# Altium PCB CHILD_BOARD_revA.PcbDoc (part 2 of 3)
Units mil, origin at the board's own origin, x right, y up, seen from the top; angles counter-clockwise.
Board outline 6000 x 4000 mil, 2 copper layers (Top Layer, Bottom Layer); 312 components, 224 nets, 1180 pads, 0 vias.
Unrouted connection lines stored in the file: 721.
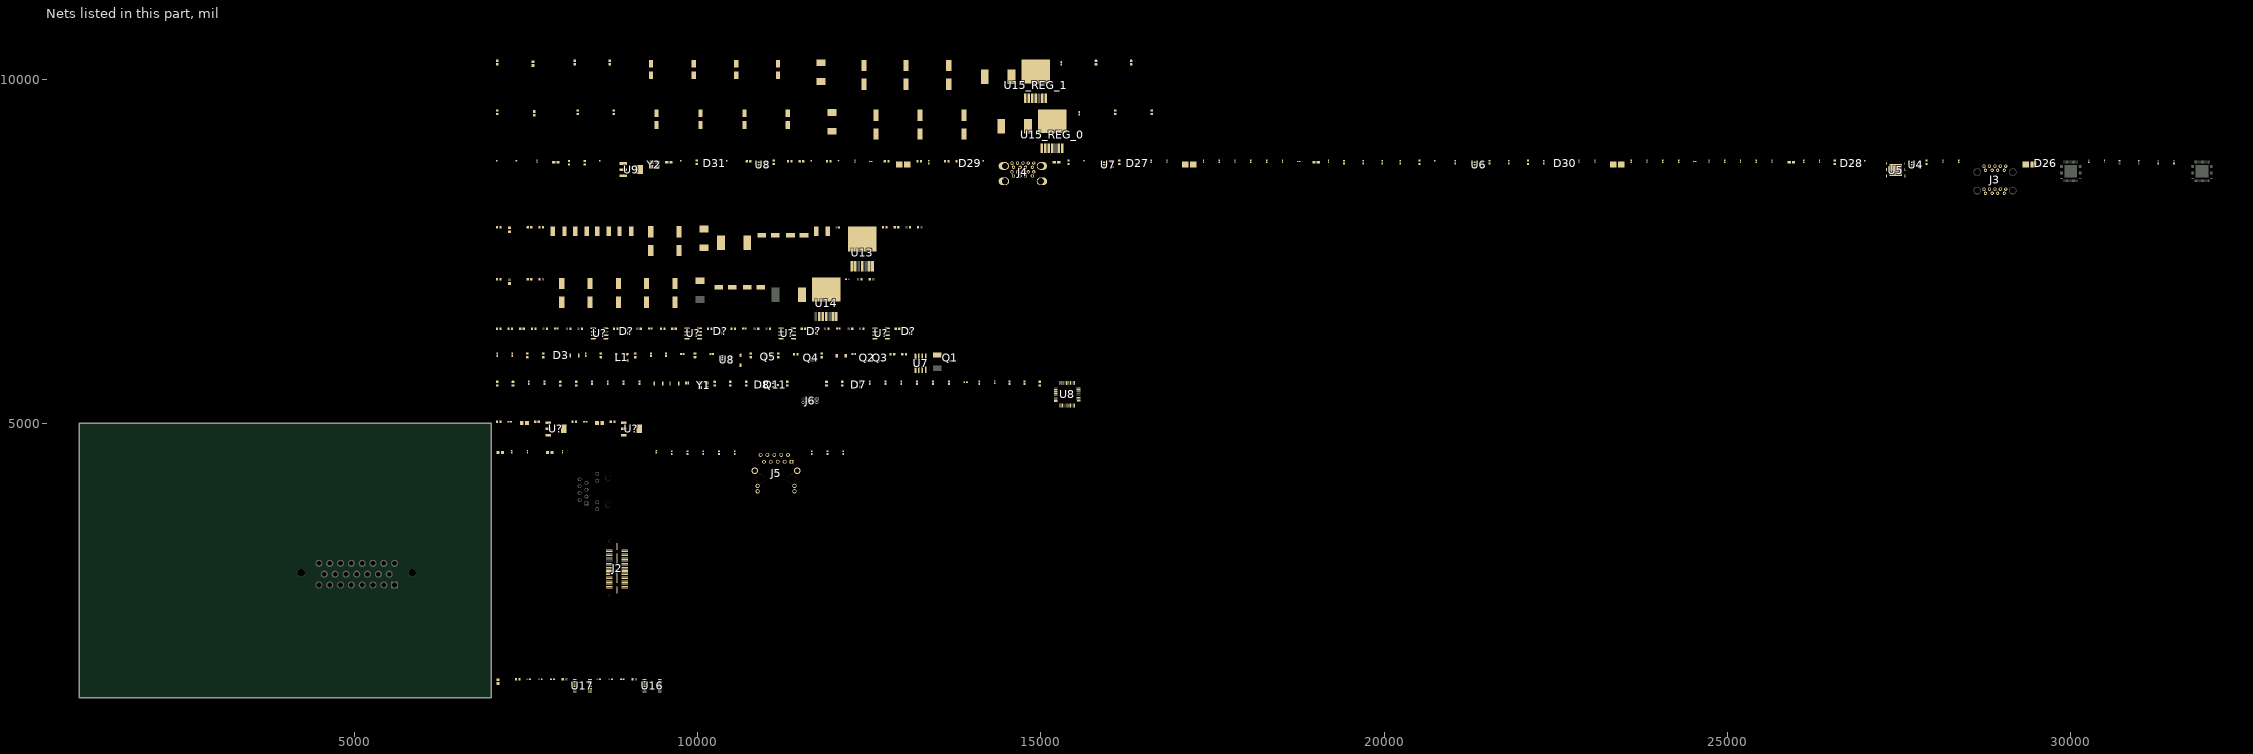
[diagram p2: the nets of this part, all layers, seen from the top]

## Footprints (in the part's own frame and the unit in brackets; to place one, negate y for a bottom-side part, rotate by r counter-clockwise, add the part's x,y. Pads: shape width x height; smd on the part's side, far side on the other; paste and mask are expansions set on the pad) (continued)
TCAN1146DYYRQ1-Footprint-1 [mil]
  rect 38.5x12 smd paste+0 mask+0: 1(-60.75,59.07) 2(-60.75,39.38) 3(-60.75,19.69) 4(-60.75,0) 5(-60.75,-19.69) 6(-60.75,-39.38) 7(-60.75,-59.07) 8(60.75,-59.07) 9(60.75,-39.38) 10(60.75,-19.69) 11(60.75,0) 12(60.75,19.69) 13(60.75,39.38) 14(60.75,59.07)
  silkscreen extent -46,-90 100,90, body extent -66,-84 66,84, height 43
TSQFP50P900X900X160-48N [mm] "TSQFP, 48-Leads, Body 7.00x7.00mm, Pitch 0.50mm, IPC Medium Density"
  oval 1.45x0.3 smd: 1(-4.225,2.75) 2(-4.225,2.25) 3(-4.225,1.75) 4(-4.225,1.25) 5(-4.225,0.75) 6(-4.225,0.25) 7(-4.225,-0.25) 8(-4.225,-0.75) 9(-4.225,-1.25) 10(-4.225,-1.75) 11(-4.225,-2.25) 12(-4.225,-2.75) 25(4.225,-2.75) 26(4.225,-2.25) 27(4.225,-1.75) 28(4.225,-1.25) 29(4.225,-0.75) 30(4.225,-0.25) 31(4.225,0.25) 32(4.225,0.75) 33(4.225,1.25) 34(4.225,1.75) 35(4.225,2.25) 36(4.225,2.75)
  oval 0.3x1.45 smd: 13(-2.75,-4.225) 14(-2.25,-4.225) 15(-1.75,-4.225) 16(-1.25,-4.225) 17(-0.75,-4.225) 18(-0.25,-4.225) 19(0.25,-4.225) 20(0.75,-4.225) 21(1.25,-4.225) 22(1.75,-4.225) 23(2.25,-4.225) 24(2.75,-4.225) 37(2.75,4.225) 38(2.25,4.225) 39(1.75,4.225) 40(1.25,4.225) 41(0.75,4.225) 42(0.25,4.225) 43(-0.25,4.225) 44(-0.75,4.225) 45(-1.25,4.225) 46(-1.75,4.225) 47(-2.25,4.225) 48(-2.75,4.225)
  silkscreen extent -4.35,-3.1 3.1,3.57, body extent -3.5,-3.5 3.5,3.5, height 1.6
WE-PD-L [mm] "SMD Inductor, 2-Leads, Body 12.0 x 12.0 mm"
  rect 2.9x5.4 smd: 1(-4.95,0) 2(4.95,0)
  silkscreen extent -6.25,-6.25 6.25,6.25, body extent -6,-6 6,6, height 5.98
WL-SBCD_0606 [mm] "SMT Bi-color Chip LED Diffuesed, body 1.5x1.6mm"
  rect 0.5x0.8 smd: 1(-0.45,0.8) 2(-0.45,-0.8) 3(0.45,-0.8) 4(0.45,0.8)
  silkscreen extent -0.07,1.48 0.08,1.62, body extent -0.75,-0.8 0.75,0.8, height 0.55

## Part data
C8 C9 C10 C11 C12 C13 C14 C17 C18 C19 C20 C21 C22 C23 C24 C25 C26 C27 C33 C34 C35 C36 C39 C40 C? C? C? C? C? C? C? C? C? C? C? C? C? C? C?_REG_0 C?_REG_1: library part CMP-001-00058-1, "LARGE PADS, 0402 CAP, CHANGE COMMENT TO MATCH REAL P/N", Capacitor Type=Ceramic, Case/Package=0402, Max Operating Temperature=85°C, Min Operating Temperature=-55°C, Mounting Technology="Surface Mount", Pins=2, RoHS Compliant=Yes
C55 C61 C77 C89: library part CMP-1664-00002-2, "Tantalum Capacitor, 330 uF, +/- 20%, 2.5 V, -55 to 105 degC, 2-Pin Molded, RoHS, Tape and Reel", Capacitance="330 uF", Case/Package=1411, Max Operating Temperature="105 degC", Min Operating Temperature="-55 degC", Package Quantity=2000, ComponentLink1Description="Manufacturer URL", ComponentLink1URL=http://www.kemet.com/, ComponentLink2Description=Datasheet, ComponentLink2URL=http://capacitoredge.kemet.com/capedge2/DataSheet?pn=T520B337M2R5ATE045, DatasheetVersion=07/2016, Height="2.1 mm", Length="3.5 mm", Mount="Surface Mount", Mounting Technology="Surface Mount", PackageDescription="2-Pin Surface Mount Device, Body 3.5 x 2.8 mm", Packaging="Tape and Reel", PartNumber=T520B337M2R5ATE045, Radiation Hardening=No, RoHSCompliant=True, Width="2.8 mm"
C56 C57 C59 C60 C62 C63 C64 C65 C66 C67 C68 C69 C70 C71 C72 C73 C74 C75 C78 C79 C80 C81 C82 C83 C84 C85 C86 C87 C90 C91 C96 C97 C98 C99 C100: library part CMP-2000-05393-2, "Multilayer Ceramic Capacitors 100nF ±10% 50V X7R SMD 0402", Capacitance=100nF, Case Code (Imperial)=0402, Case Code (Metric)=1005, Dielectric=X7R, Dielectric Material=Ceramic, Max Operating Temperature=125°C, Min Operating Temperature=-55°C, Package Quantity=1, Tolerance=10%, Voltage=50V, Case/Package=0402, Construction=Flat, Depth=0.5mm, Height=0.5mm, Lead Free="Lead Free", Length=1mm, Mount="Surface Mount", Packaging="Tape and Reel", Radiation Hardening=No, REACH SVHC="No SVHC", Resistor Type=Ceramic, RoHS Compliant=Yes, Series=C, Termination=SMD/SMT, Thickness=0.022inch, Voltage Rating=50V, Voltage Rating (DC)=50V, Weight=2.3E-05oz, Width=0.02inch
C58 C76 C88 C94 C95: library part CMP-2006-02792-2, "Chip Multilayer Ceramic Capacitors for General Purpose, 0603, 10uF, X5R, 15%, 20%, 6.3V", Capacitance=10uF, Case Code (Imperial)=0603, Case Code (Metric)=1608, Dielectric=X5R, Max Operating Temperature=85°C, Min Operating Temperature=-55°C, Package Quantity=4000, Tolerance=20%, Voltage=6.3V, Case/Package=0603, Depth=0.8mm, Height=0.8mm, Lead Free="Lead Free", Length=1.6mm, Material=Ceramic, Mount="Surface Mount", Packaging="Tape and Reel", Radiation Hardening=No, REACH SVHC="No SVHC", Termination=SMD/SMT, Thickness=0.035inch, Voltage Rating=6.3V, Voltage Rating (DC)=6.3V, Width=0.031inch
C92 C93: library part CMP-1035-00914-3, "CAP CER 30PF 50V 5% NP0 0603", Capacitance="30 pF", Manufacturer=KEMET, Package=C0603C-CF, Temperature="-55°C to +125°C", Temperature Characteristic=C0G, Temperature Coefficient=30ppm/°C, Temperature Range High=+125°C, Temperature Range Low=-55°C, Tolerance=0.05, Voltage Rating="50 V", Automotive=Yes, Automotive Grade="Grade 1", Category=Cap, ComponentLink2Description=Datasheet, ComponentLink2URL=https://api.kemet.com/component-edge/download/datasheet/C0603C100J5GACAUTO.pdf, Device Class L1="Passive Components", Device Class L2=Capacitors, Device Class L3="Ceramic Capacitors", Digikey Description="CAP CER 30PF 50V 5% NP0 0603", Height=0.87mm, Lead Free=Yes, Manufacturer Part Number=C0603C300J5GACTU, Material=Ceramic, Mouser Description="Multilayer Ceramic Capacitors MLCC - SMD/SMT 50volts 30pF C0G 5%", Octopart=https://octopart.com/c0603c300j5gactu-kemet-199455, RoHS=TRUE
C141 C142 C148 C149: library part CMP-05428-001211-1, "Conductive Polymer Hybrid Aluminum Electrolytic Capacitors 68uF ±20% 35V RADIAL SMT 6.3x7.7mm", Capacitance=68uF, Case/Package=Radial, ESR (Equivalent Series Resistance)=35mR, Leakage Current=23.8uA, Max Operating Temperature=105°C, Min Operating Temperature=-55°C, Package Quantity=900, Ratings=AEC-Q200, Ripple Current=2A, Tolerance=20%, Voltage=35V, Construction=Cylindrical, Diameter=6.3mm, Height=7.7mm, Height - Seated (Max)=0.315inch, Lead Diameter=0.65mm, Lead Free="Lead Free", Lead Pitch=1.8mm, Length=7.7mm, Life (Hours)=5000Hour, Material=Polymer, Mount="Surface Mount", Number of Pins=8, Packaging="Tape and Reel", Polarity=Polar, Radiation Hardening=No, REACH SVHC="No SVHC", Ripple Current (AC)=2A, Series=ZA, Technology=HYBRID, Termination=SMD/SMT, Voltage Rating=35V, Voltage Rating (DC)=35V
C143 C253 C254 C255 C256: library part CMP-1040-01539-1, "CAP 470nF 50V ±10% 1812 (4532 Metric) Thickness 1.25mm SMD", Case-EIA=1812, Case-Metric=4532, Rated Voltage="50 V", Tolerance=Â±10%, Max Thickness="1.25 mm", Technology=SMT
C145 C146 C150 C151 C152 C153 C154: library part CMP-05428-000021-2, "Conductive Polymer Aluminum Solid Capacitors (OS-CON) 120uF ±20% 16V RADIAL SMT 8x6.9mm", Capacitance=120uF, Case/Package=Radial, ESR (Equivalent Series Resistance)=27mR, Leakage Current=500uA, Max Operating Temperature=105°C, Min Operating Temperature=-55°C, Package Quantity=1000, Ripple Current=2.9A, Tolerance=20%, Voltage=16V, Construction=Cylindrical, Diameter=8mm, Dissipation Factor=12%, Height=6.9mm, Height - Seated (Max)=0.276inch, Lead Free="Lead Free", Length=6.9mm, Life (Hours)=2000Hour, Mount="Surface Mount", Number of Pins=7, Packaging="Tape and Reel", Polarity=Polar, REACH SVHC="No SVHC", Ripple Current (AC)=2.9A, RoHS Compliant=Yes, Series="OS-CON, SVPC", Termination=SMD/SMT, Voltage Rating=16V, Voltage Rating (DC)=16V
C156_REG_0 C156_REG_1 C157_REG_0 C157_REG_1 C158_REG_0 C158_REG_1: library part CMP-05428-001387-1, "Conductive Polymer Aluminum Solid Capacitors (OS-CON) 33uF ±20% 20V RADIAL SMT 8x6.9mm", Capacitance=33uF, Case/Package=Radial, ESR (Equivalent Series Resistance)=45mR, Leakage Current=132uA, Max Operating Temperature=105°C, Min Operating Temperature=-55°C, Package Quantity=1000, Ripple Current=1.89A, Tolerance=20%, Voltage=20V, Construction=Cylindrical, Diameter=8mm, Dissipation Factor=12%, Height=6.9mm, Height - Seated (Max)=0.276inch, Length=6.9mm, Life (Hours)=2000Hour, Mount="Surface Mount", Number of Pins=7, Packaging="Tape and Reel", Polarity=Polar, REACH SVHC="No SVHC", Ripple Current (AC)=1.89A, RoHS Compliant=Yes, Series="OS-CON™, SVP", Termination=SMD/SMT, Voltage Rating=20V, Voltage Rating (DC)=20V
C159_REG_0 C159_REG_1 C160_REG_0 C160_REG_1 C161_REG_0 C161_REG_1 C162_REG_0 C162_REG_1: library part CMP-05427-000047-1, "CAP ALUM 100UF 20% 10V SMD", Capacitance=100uF, Case/Package=Radial, Max Operating Temperature=85°C, Min Operating Temperature=-40°C, Package Quantity=1, Ripple Current=50mA, Tolerance=20%, Voltage Rating=10V, Construction=Cylindrical, Contact Plating=Tin, Diameter=5mm, Height=5.4mm, Height - Seated (Max)=0.213inch, Lead Free="Lead Free", Length=5.5mm, Life (Hours)=1000Hour, Mount="Surface Mount", Packaging="Tape and Reel", Radiation Hardening=No, Ripple Current (AC)=50mA, RoHS Compliant=Yes, Series=S, Termination=SMD/SMT, Voltage Rating (DC)=10V
C? C?: library part CMP-001-00000-11, "Non-polarized capacitor"
D1: library part CMP-1060-00565-1, "Zener Voltage Regulator, 500 mW, 2-Pin SOD-123, Pb-Free, Tape and Reel", Manufacturer="On Semiconductor", ComponentLink1Description="Manufacturer URL", ComponentLink1URL=http://www.onsemi.com/, ComponentLink2Description=Datasheet, ComponentLink2URL=http://www.onsemi.com/pub_link/Collateral/MMSZ5221BT1-D.PDF, ComponentLink3Description="Package Specification", ComponentLink3URL=http://www.onsemi.com/pub_link/Collateral/425-04.PDF, DatasheetVersion="Rev. 12", Mounting Technology="Surface Mount", P Max (W)=0.5, PackageDescription="2-Pin SOD, Body 1.6 x 2.69 mm", PackageReference=SOD-123-2-425-04, PackageVersion="Rev. G, 10/2009", Packing="Tape and Reel", PartNumber=MMSZ5242BT1G, RoHS=Pb-Free, VZ Typ (V)=12
D2: library part CMP-2000-04993-2, "DIODE GEN PURP 100V 150MA SOD123", Average Rectified Current=150mA, Capacitance=4pF, Forward Voltage=1V, Max Forward Surge Current (Ifsm)=1A, Max Operating Temperature=150°C, Max Repetitive Reverse Voltage (Vrrm)=100V, Max Reverse Leakage Current=5uA, Max Surge Current=2A, Min Operating Temperature=-65°C, Package Quantity=3000, Power Dissipation=400mW, Current Rating=150mA, Element Configuration=Single, Forward Current=150mA, Height=1.2mm, Lead Free="Lead Free", Length=2.85mm, Max Reverse Voltage (DC)=100V, Mount="Surface Mount", Number of Pins=2, Output Current=150mA, Packaging="Tape and Reel", Peak Non-Repetitive Surge Current=2A, Polarity=Standard, Radiation Hardening=No, Recovery Time=4ns, Reverse Recovery Time=4ns, Voltage Rating (DC)=100V, Width=1.8mm
D3: library part CMP-12225-000055-1, "TVS DIODE 26.5V 44V SOT323-3", Breakdown Voltage=28.5V, Capacitance=3pF, Clamping Voltage=44V, Manufacturer=STMicroelectronics, Max Junction Temp=+175°C, Package=SOT323-3L, Peak Pulse Current=3A, Peak Pulse Power=170W, Reverse Standoff Voltage=26.5V, Temperature="-55°C to +175°C", Temperature Range Low=-55°C, Automotive=Yes, Automotive Grade="Grade 0", Category=Diode, ComponentLink2Description=Datasheet, ComponentLink2URL=https://www.st.com/resource/en/datasheet/esdcan02-2bwy.pdf, Device Class L1="Circuit Protection", Device Class L2="TVS Diodes", Device Class L3=unset, Digikey Description="TVS DIODE 26.5V 44V SOT323-3", Direction=Bidirectional, Height=1.1mm, Ipc Land Pattern Name=SOT65P210X95-3, Lead Free=Yes, Manufacturer Part Number=ESDCAN02-2BWY, Mouser Description="TVS Diodes / ESD Suppressors Automotive dual-line Transil, Transient voltage suppressor (TVS) for CAN bus", Number of Channels=2, Octopart=https://octopart.com/esdcan02-2bwy-stmicroelectronics-58631133, RoHS=TRUE, Standoff Height=0mm, Temperature Range High=+175°C
D7 D8 D? D? D? D?: library part CMP-004-00040-2, "Led, Red/Grn, 180Mcd/230Mcd, 624Nm/525Nm Rohs Compliant: Yes", Component Type=Standard, Design Item ID=CMP-004-00034-2, Pins=4, Source=rgled.SchLib
D26 D27 D28 D29 D30 D31: library part CMP-04989-000002-1, "4-CHANNEL LOW-CAPACITANCE SURGE", Ambient Temperature Range High=+125°C, Ambient Temperature Range Low=-40°C, Breakdown Voltage=5.5V, Capacitance=0.55pF, Clamping Voltage=11.5V, Manufacturer="Texas Instruments", Manufacturer Part Number=ESD204DQAR, Package=DQA0010A, Peak Pulse Current=5.5A, Peak Pulse Power=50W, Reverse Standoff Voltage=3.6V, Temperature="-40°C to +125°C", Automotive=No, Category=Diode, ComponentLink2Description=Datasheet, ComponentLink2URL=http://www.ti.com/lit/ds/symlink/esd204.pdf, Device Class L1="Circuit Protection", Device Class L2="TVS Diodes", Device Class L3=unset, Digikey Description="4-CHANNEL LOW-CAPACITANCE SURGE", Direction=Bidirectional, Height=0.55mm, Lead Free=Yes, Mouser Description="4-Channel Low-Capacitance Surge and ESD Protection Diode 10-USON -40 to 125", Number of Channels=4, Octopart=https://octopart.com/esd204dqar-texas+instruments-89917476, RoHS=TRUE, Standoff Height=0mm, Temperature Range High=+125°C, Temperature Range Low=-40°C
D37 D38 D39_REG_0 D39_REG_1: library part CMP-2000-05097-3, "DIODE SCHOTTKY 40V 5A SMC", Capacitance=300pF, Forward Current=5A, Manufacturer="Diodes Inc.", Max Junction Temp=+150°C, Max Repetitive Reverse Voltage=40V, Max Surge Forward Current=100A, Package=SMC, Peak Reverse Current=0.5mA, Temperature="-55°C to +150°C", Temperature Range Low=-55°C, Automotive=No, Automotive Grade=NA, Category=Diode, ComponentLink2Description=Datasheet, ComponentLink2URL=https://www.diodes.com/assets/Datasheets/ds13012.pdf, Device Class L1="Discrete Semiconductors", Device Class L2=Diodes, Device Class L3="Schottky Diodes", Digikey Description="DIODE SCHOTTKY 40V 5A SMC", Footprint Url=https://www.diodes.com/assets/Package-Files/SMC.pdf, Height=2.5mm, Lead Free=Yes, Manufacturer Part Number=B540C-13-F, Mouser Description="Diode: Schottky rectifying; SMD; 40V; 5A; SMC; Package: reel, tape", Octopart=https://octopart.com/b540c-13-f-diodes+inc.-325873, Reverse Voltage=40V, RoHS=TRUE, Standoff Height=0.1mm, Temperature Range High=+150°C
F1: library part CMP-16042-000002-1, "DIFF P#!!! /  / FUSE BRD MNT 10A 125VAC/VDC", Fuse Current=15A, Fuse Interrupt Ac Current=50A, Fuse Interrupt Dc Current=300A, Fuse Voltage Drop=0.13V, Manufacturer="Bel Fuse", Manufacturer Part Number=0679L9150-01, Max Fuse Ac Voltage=125V, Package=0679L, Resistance=0.0038Ω, Temperature="-55°C to +125°C", Temperature Range High=+125°C, Temperature Range Low=-55°C, Automotive=Yes, Automotive Grade="Grade 1", Category=Fuse, ComponentLink2Description=Datasheet, ComponentLink2URL=https://www.belfuse.com/resources/CircuitProtection/datasheets/0679L%20Sep2016.pdf, Device Class L1="Circuit Protection", Device Class L2=Fuses, Device Class L3=unset, Digikey Description="FUSE BRD MNT 15A 125VAC/VDC", Fuse Blow Speed=Fast, Fuse I2T=103.5A2Sec, Height=2.79mm, Ipc Land Pattern Name=CAPC610254X254, Lead Free=Yes, Max Fuse Dc Voltage=125V, Octopart=https://octopart.com/0679l9150-01-bel+fuse-70850665, RoHS=TRUE, Voltage Rating=125V
FB1: library part CMP-0686-00252-4, "Chip Ferrite Bead, 0402, 600Ω @ 100MHz, 0.23Ω, 25%, 900mA", Case Code (Imperial)=0402, Case Code (Metric)=1005, Current Rating=900mA, DC Resistance (DCR)=230mR, Max Operating Temperature=125°C, Min Operating Temperature=-55°C, Package Quantity=10000, Test Frequency=100MHz, Tolerance=25%, Case/Package=0402, Height=0.5mm, Impedance=600R, Lead Free="Lead Free", Length=1mm, Material=Steel, Max Current Rating=900mA, Max DC Current=900mA, Number of Circuits=1, Number of Lines=1, Number of Pins=2, Packaging="Tape and Reel", Termination=SMD/SMT, Width=0.5mm
J1: library part CMP-03369-000157-2, "CONN HEADER R/A 23POS 4MM", Color=Black, Current Rating=17A, Flammability Rating="UL94 V-0", Max Operating Temperature=221°C, Max Voltage Rating (AC)=250V, Min Operating Temperature=-40°C, Package Quantity=1, Circuit Application=Power, Connector System=Wire-to-Device, Connector Type=Header, Contact Finish - Mating=TIN, Contact Material=Brass, Contact Plating=Tin, Contact Shape=Circular, Contact Type="Male Pin", Depth=37.9mm, ELV=Compliant, Fastening Type=Ramp, Gender=Male, Housing Color=Black, Housing Material=Polybutylene, Insulation Color=Black, Insulation Material=PBT, Lead Free="Lead Free", Length=60.8mm, Mount="Through Hole", Number of Contacts=23, Number of Ports=1, Number of Positions=23, Number of Rows=3, Number of Signal Positions=23, Number of Terminals/Pins=23, Orientation="Right Angle", Packaging=Bulk, PCB Mount Alignment="Yes (With)", PCB Mount Retention=With, PCB Thickness=0.062inch, Pitch=0.157inch, Primary Type=Rectangular, Radiation Hardening=No, RoHS Compliant=Yes, Row Spacing=0.157inch, Sealable="Yes (With)", Series=Ampseal, Shielding=Unshielded, Tab Thickness=1.3mm, Termination=Solder, Voltage Rating (AC)=250V, Width=37.9mm
J2: library part CMP-02761-000083-1, "CONN RCPT 60POS SMD GOLD", Housing Color=Black, Max Operating Temperature=125°C, Max Voltage Rating (AC)=125V, Min Operating Temperature=-55°C, Contact Material=Bronze, Contact Plating=Gold, Depth=7.49mm, Gender=Female, Housing Material=Polymer, Lead Free="Lead Free", Length=21.27mm, Mount="Surface Mount", Number of Contacts=60, Number of Rows=2, Orientation=Straight, Packaging="Tape and Reel", Pitch=0.5mm, Radiation Hardening=No, Termination=Solder, Voltage Rating (AC)=125V
J3: library part CMP-002-00076-1, "USB Connector, 9+9 Contact(s), Female, Straight, Solder Terminal, Receptacle"
J4: library part CMP-1502-03222-3, Color=Blue, Contact Resistance=50mΩ, Current Rating=1.8A, Flammability Rating="UL94 V-0", Insulation Resistance=100MΩ, Max Operating Temperature=85°C, Min Operating Temperature=-40°C, Operating Supply Voltage=30V, Connector Type=USB, Contact Material="Bronze, Gold, Nickel", Contact Plating=Gold, Features=Shielded, Gender=Receptacle, Height=16.335mm, Lead Free="Lead Free", Length=15.59mm, Mount="Horizontal, Through Hole", NexarPartId=19667819, Number of Contacts=18, Number of Pins=18, Number of Ports=2, Orientation="Right Angle", REACH SVHC=Unknown, RoHS=Compliant, Termination="Through Hole", USB Standard="USB 3.0", Voltage Rating=30V, Voltage Rating (AC)=30V, Width=19.7mm
J5: library part CMP-27893-000001-1, "RJ45 JACK W/MAG 1X1 1000BASE-T", Manufacturer=Abracon, Package=0, Temperature="-40°C to +85°C", Temperature Range High=+85°C, Temperature Range Low=-40°C, Automotive=No, Category=Conn, ComponentLink2Description=Datasheet, ComponentLink2URL=https://abracon.com/Magnetics/ARJM11.pdf, Conn Gender=Female, Conn Orientation="Right Angle", Contact Material=Gold, Device Class L1=Connectors, Device Class L2="Modular / Ethernet Connectors", Device Class L3=unset, Digikey Description="RJ45 JACK W/MAG 1X1 1000BASE-T", Height=15.8mm, Is Female=yes, Lead Free=Yes, Manufacturer Part Number=ARJM11C7-502-AB-ER2-T, Number of Contacts=10, Octopart=https://octopart.com/arjm11c7-502-ab-er2-t-abracon-86945316, Pitch=1.27mm, RoHS=TRUE, Shielding=true
J6: library part CMP-002-00041-5, "Board Connector, 10 Contact(s), 2 Row(s), Male, Right Angle, 0.05 inch Pitch, Surface Mount Terminal, Locking, Black Insulator", Connector Type="BOARD CONNECTOR", Mounting Technology=Board, RoHS Compliant=Yes
J?: library part CMP-2000-06754-2, "CONN MOD JACK 8P8C R/A UNSHLD", Color=Black, Contact Resistance=30mR, Current Rating=1.5A, Flammability Rating="UL94 V-0", Max Operating Temperature=105°C, Min Operating Temperature=-40°C, Package Quantity=40, Ratings=IP67, Voltage Rating=100V, Connector Type=Jack, Contact Material=Bronze, Contact Plating=Gold, Depth=26.95mm, Direction=Down, Gender=Female, Housing Color=Black, Housing Material=PC, Lead Free="Lead Free", Length=30.3mm, Max Current Rating=1.5A, Mount="Through Hole", Number of Contacts=8, Number of Ports=1, Number of Positions=8, Number of Positions Loaded=8, Number of Rows=1, Orientation="Right Angle", Packaging=Bulk, Pitch=2.54mm, Primary Type=MODULAR, Radiation Hardening=No, RoHS Compliant=Yes, Series=MRJ, Shielding=Unshielded, Termination="Through Hole", Voltage Rating (DC)=100V
L1: library part CMP-07251-000006-1, "CMC 51UH 200MA 2LN 2KOHM SMD", Case/Package=4532, Current=200mA, DC Resistance (DCR)=3.5R, Inductance=51uH, Insulation Resistance=10MR, Max Operating Temperature=125°C, Min Operating Temperature=-40°C, Package Quantity=1, Resistance=2kR, Self Resonant Frequency=100kHz, Tolerance=50%, Voltage Rating (DC)=50V, Contact Plating=Tin, Core Material=Ferrite, Current Rating=200mA, DC Current=200mA, Depth=3.4mm, Element Configuration=Dual, Height=0.118inch, Impedance=2kR, Lead Free="Lead Free", Length=4.5mm, Material=Steel, Max DC Current=200mA, Mount="Surface Mount", Number of Lines=2, Packaging="Tape and Reel", REACH SVHC="No SVHC", RoHS Compliant=Yes, Series=SRF4532, Termination=SMD/SMT, Test Frequency=100kHz, Width=0.126inch
L9: library part CMP-2000-07146-2, "FIXED IND 15UH 5A 27 MOHM SMD", Case/Package=1260, Current Rating=5A, DC Resistance (DCR)=27mR, Frequency=17.6MHz, Inductance=15uH, Inductance Tolerance=20%, Max Operating Temperature=125°C, Min Operating Temperature=-40°C, Package Quantity=600, Resistance=27MR, Resistor Type=Wirewound, Saturation Current=4.6A, Test Frequency=100kHz, Core Material=Ferrite, DC Current=5A, Depth=12.8mm, Height=6mm, Height - Seated (Max)=0.256inch, Length=12.5mm, Material=Steel, Max DC Current=5A, Military Standard=Not, Mount="Surface Mount", Number of Pins=2, Packaging="Tape and Reel", Q Factor=25, REACH SVHC="No SVHC", RMS Current (Irms)=5A, RoHS Compliant=Yes, Sample Rate (Hz)=100kHz, Self Resonant Frequency=17.6MHz, Series=SRR1260, Shielding=Shielded, Termination=SMD/SMT, Tolerance=20%, Width=12.5mm
L10 L11_REG_0 L11_REG_1: library part CMP-0227-00708-1, "SMD-Shielded Power Inductor WE-PD, L = 10.0 µH", Inductance="10.0 ÂµH", ComponentLink1Description="Manufacturer Link", ComponentLink1URL=http://www.we-online.com, ComponentLink2Description=Datasheet, ComponentLink2URL=http://www.we-online.de/katalog/media/pdf/74477110.pdf, DatasheetVersion="ver 7, Sep-2006", PackageDescription="SMD Inductor, 2-Leads, Body 12.0 x 12.0 mm", PackageReference=WE-PD-L, PackageVersion=2006
Q1 Q2 Q3 Q4: library part CMP-013-00018-2, "Trans MOSFET P-CH 20V 22.1A 8-Pin PowerPAK 1212 EP T/R", Component Type=Standard, Design Item ID=CMP-013-00036-4, Pins=5, Source=SISH615ADN-T1-GE3.SchLib
Q5: library part CMP-2000-05968-1, "N-Channel Enhancement Mode Mosfet, 50 V, 200 mA, -55 to 150 degC, 6-Pin SOT-323, RoHS, Tape and Reel", Id - Continuous Drain Current=200mA, Manufacturer=DiodesIncorporated, Maximum Operating Temperature=+150C, Minimum Operating Temperature=-55C, Package / Case=SOT-323-3, Package Description="3-Pin Small Outline Transistor, Body 2 x 1.25 mm, Pitch 0.65 mm", Package Reference=SOT323, Pd - Power Dissipation=200mW, Rds On - Drain-Source Resistance=1.4Ohms, Vds - Drain-Source Breakdown Voltage=75V, Vgs - Gate-Source Voltage=20V, Brand=DiodesIncorporated, Channel Mode=Enhancement, Configuration=Single, Datasheet URL=http://www.diodes.com/_files/datasheets/ds30206.pdf, Datasheet Version="Rev. 11-2, 09/2013", Factory Pack Quantity=3000, Forward Transconductance - Min=0.1S, Height=1mm, Length=2.2mm, Manufacturer URL=http://www.diodes.com/, Mounting Style=SMD/SMT, Mounting Technology=SurfaceMount, Number of Channels=1Channel, Packaging=Reel, Product=MOSFETSmallSignal, Product Category=MOSFET, RoHS=True, Series=BSS138, Technology=Si, Transistor Polarity=N-Channel, Transistor Type=1N-Channel, Type=EnhancementModeFieldEffectTransistor, Typical Turn-Off Delay Time=20ns, Typical Turn-On Delay Time=20ns, Unit Weight=0.000212oz, Width=1.35mm
Q11: library part CMP-2000-06170-1, "P-Channel Enhancement Mode MOSFET, 310 mW, 20 V, -55 to 150 degC, 3-Pin SOT-323, RoHS, Tape and Reel", Drain-Source On Resistance-Max=750mO, Drain-to-Source Voltage [Vdss]=20V, Manufacturer="Diodes Inc", Package Description="3-Pin Small Outline Transistor, Body 2 x 1.25 mm, Pitch 0.65 mm", Package Reference=SOT323, Rated Power Dissipation=310mW, Channel Type=P-Channel, Datasheet URL=http://www.diodes.com/_files/datasheets/ds31861.pdf, Datasheet Version="Rev. 3-2, 09/2013", Manufacturer URL=http://www.diodes.com/, Mounting Technology=SurfaceMount, Qg Gate Charge=0.622nC
R28 R31 R32 R33 R34 R35 R36 R37 R38 R50 R52 R54 R56 R57 R59 R60 R63 R64 R65 R66 R? R? R? R? R? R? R? R? R? R? R? R? R? R? R? R? R? R? R? R? R? R? R? R? R? R? R? R? R? R? R? R? R? R? R? R? R? R? R? R? R? R? R? R? R? R? R? R? R? R?_REG_0 R?_REG_0 R?_REG_0 R?_REG_0 R?_REG_0 R?_REG_1 R?_REG_1 R?_REG_1 R?_REG_1 R?_REG_1: library part CMP-009-00002-14, "Resistor"
R30 R42 R46 R51: library part CMP-2000-00180-1, Manufacturer=Panasonic, Part Number=ERJ-3EKF1001V
R31 R44 R48 R52: library part CMP-1012-00623-3, "Chip Resistor, 10 KOhm, +/- 1%, 0.1 W, -55 to 155 degC, 0603 (1608 Metric), RoHS, Tape and Reel", Case Code (Imperial)=0603, Case Code (Metric)=1608, Manufacturer=Panasonic, Max Operating Temperature=155degC, Max Power Dissipation=100mW, Min Operating Temperature=-55degC, Package Description="2-Pin Surface Mount Device, Body 1.6 x 0.85 mm", Package Quantity=1, Package Reference=603, Resistance=10KOhm, Temperature Coefficient=100ppm\/degreesC, Tolerance=1%, Voltage Rating=75V, Case\/Package=0603, Composition=ThickFilm, Contact Plating=Tin, Datasheet URL=https://industrial.panasonic.com/cdbs/www-data/pdf/RDA0000/AOA0000C304.pdf, Datasheet Version=02/2017, Depth=0.8mm, Height=0.45mm, Lead Free=LeadFree, Length=1.6mm, Manufacturer URL=http://www.panasonic.com/, Military Standard=Not, Mount=SurfaceMount, Mounting Technology=SurfaceMount, Number of Pins=2, Number of Terminations=2, Packaging=TapeandReel, Power Rating=100mW, Radiation Hardening=No, REACH SVHC=NoSVHC, RoHSCompliant=true, Termination=SMD/SMT, Voltage Rating (DC)=75V, Width=0.031inch
R32 R33 R40 R53 R54 R55 R56 R57 R58 R59 R184 R185 R186 R187 R188 R189 R190 R191 R192 R193 R194: library part CMP-009-00118-2, "READ THE NAME", Component Type=Standard, Design Item ID=CMP-009-00206-2, Pins=2, Source=0402jump.SchLib
R60 R61: library part CMP-2000-00213-2, "Chip Resistor, 120 Ohm, +/- 1%, 0.1 W, -55 to 155 degC, 0603 (1608 Metric), RoHS, Tape and Reel", Case Code (Imperial)=0603, Case Code (Metric)=1608, Manufacturer=Panasonic, Max Operating Temperature=155degC, Max Power Dissipation=100mW, Min Operating Temperature=-55degC, Package Description="2-Pin Surface Mount Device, Body 1.6 x 0.85 mm", Package Quantity=1, Resistance=120Ohm, Temperature Coefficient=100ppm/degreesC, Tolerance=1%, Voltage Rating=75V, Case/Package=0603, Composition=ThickFilm, Contact Plating=Tin, Datasheet URL=https://industrial.panasonic.com/cdbs/www-data/pdf/RDA0000/AOA0000C283.pdf, Datasheet Version=42095.0, Depth=0.8mm, Height=0.022inch, Lead Free=LeadFree, Length=1.6mm, Manufacturer URL=http://www.panasonic.com/, Military Standard=Not, Mount=SurfaceMount, Number of Pins=2, Number of Terminations=2, Package Reference=0603, Package URL=http://www.st.com/st-web-ui/static/active/en/resource/technical/document/datasheet/CD00001320.pdf, Packaging=TapeandReel, Power Rating=100mW, Radiation Hardening=No, REACH SVHC=NoSVHC, RoHSCompliant=true, Termination=SMD/SMT, Voltage Rating (DC)=75V, Width=0.031inch
R133 R135 R137_REG_0 R137_REG_1 R139: library part CMP-2000-00869-1, Manufacturer=Panasonic, Part Number=ERT-J1VR103J
SW1 SW2 SW3: library part CMP-10040-000029-1, "SWITCH TACTILE SPST-NO 0.02A 15V", Current Rating=5A, Flammability Rating="UL94 V-0", Insulation Color=Black, Max Operating Temperature=85°C, Min Operating Temperature=-40°C, Operating Force=240gf, Actuator Type=Standard, Connector Type=USB, Contact Plating=Gold, Gender=Receptacle, Illumination Type=Non-Illuminated, Mechanical Life=500000Cycles, Mount="Surface Mount", Number of Contacts=24, Number of Ports=1, Packaging="Tape and Reel", Switch Function=Off-Mom, Switch Travel=0.13mm, Termination=Solder, Throw Configuration=SPST
TP5 TP6 TP7 TP8 TP54 TP55 TP56 TP57 TP58 TP59 TP60: library part CMP-00025-2, "Test Point .6mm"
U4 U6 U7 U8: library part CMP-031-00024-2, "IC PWR SW USB 1CH 1A SOT-25-5", Component Type=Standard, Design Item ID=CMP-019-00057-1, Pins=5, Source=AP2171WG-7.SchLib
U5: library part CMP-06284-000017-1, "IC HUB CTLR USB 56VQFN", Max Operating Temperature=70°C, Min Operating Temperature=0°C, Interface=USB, Lead Free="Lead Free", Packaging=Tray
U7: library part CMP-1557-00015-2, "SENSOR CURRENT HALL 25A AC/DC", Case/Package=SOIC, Current Sensing=25A, Frequency=100kHz, Max Operating Temperature=125°C, Max Supply Current=5.5mA, Max Supply Voltage=5.5V, Min Operating Temperature=-40°C, Min Supply Voltage=3V, Operating Supply Voltage=3.3V, Package Quantity=1, Quiescent Current=4mA, -3db Bandwidth=100kHz, Accuracy=4%, Bandwidth=100kHz, Height=1.5mm, Length=4.9mm, Linearity=1%, Number of Channels=1, Number of Pins=8, Packaging="Tape and Reel", Polarity=Bidirectional, REACH SVHC="No SVHC", Response Time=4.6us, RoHS Compliant=Yes, Sensitivity=55mV/A, Series=-, Width=3.9mm
U8: library part CMP-020-00018-2, "RISC Microcontroller, 32-Bit, 170MHz", RoHS Compliant=Yes
U8: library part CMP-318-000000-2, "Automotive CAN FD transceiver with watchdog, bus diagnostics and partial networking via sele 14-SOT-23-THIN -40 to 150", Component Type=Standard, Design Item ID=CMP-015-00012-2, Pin Count=14, Source=TCAN1146DYYRQ1.SchLib
U9: library part CMP-0244-00318-1, "Fixed Low Drop Positive Voltage Regulator, 1.2V (pn is for 1.5A LDO), 4-Pin SOT-223, Tape and Reel", ComponentLink1Description="Manufacturer URL", ComponentLink1URL=http://www.st.com, ComponentLink2Description=Datasheet, ComponentLink2URL=http://www.st.com/internet/com/TECHNICAL_RESOURCES/TECHNICAL_LITERATURE/DATASHEET/CD00000544.pdf, DatasheetVersion=1/11/2011, PackageDescription="4-Pin SOT-223 Package, 6.5 x 3.5 mm Body, 2.3 mm Pitch, 7 mm Lead Span", PackageReference=SOT-223, PackageVersion=2010
U13: library part CMP-0069-00211-3, "SIMPLE SWITCHER® High Efficiency 5A Step-Down Voltage Regulator with Sync, 7-pin TO-263", Manufacturer="Texas Instruments", PackageTopMarking=NSUZXYTTE#*LM2677S*-ADJ, PowerWise=N, Code_JEDEC=MO-169-AC, ComponentLink1Description="Datasheet URL", ComponentLink1URL=http://www.ti.com/general/docs/lit/getliterature.tsp?genericPartNumber=LM2677&fileType=pdf, CompType=Switcher, PackageDescription="TO-263, Molded, .400 x .390 x .180in Body, 7 Lead, .050in Pitch, Surface Mount", PackageReference=KTW0007B, PinCount=7, RoHS=N
U14: library part CMP-0069-00195-3, "SIMPLE SWITCHER® High Efficiency 5A Step-Down Voltage Regulator, 7-pin TO-263, Pb-Free", Manufacturer="Texas Instruments", PackageTopMarking=NSUZXYTTE#*LM2678*S-3.3, PowerWise=N, Code_JEDEC=MO-169-AC, ComponentLink1Description="Datasheet URL", ComponentLink1URL=http://www.ti.com/general/docs/lit/getliterature.tsp?genericPartNumber=LM2678&fileType=pdf, CompType=Switcher, PackageDescription="TO-263, Molded, .400 x .390 x .180in Body, 7 Lead, .050in Pitch, Surface Mount", PackageReference=KTW0007B, PinCount=7, RoHS=Y
U15_REG_0 U15_REG_1: library part CMP-0069-00190-3, "SIMPLE SWITCHER® High Efficiency 5A Step-Down Voltage Regulator, 7-pin TO-263", Manufacturer="Texas Instruments", PackageTopMarking=NSUZXYTTE#*LM2678*S-5.0, PowerWise=N, Code_JEDEC=MO-169-AC, ComponentLink1Description="Datasheet URL", ComponentLink1URL=http://www.ti.com/general/docs/lit/getliterature.tsp?genericPartNumber=LM2678&fileType=pdf, CompType=Switcher, PackageDescription="TO-263, Molded, .400 x .390 x .180in Body, 7 Lead, .050in Pitch, Surface Mount", PackageReference=KTW0007B, PinCount=7, RoHS=N
U16 U17: library part CMP-0054-00372-2, "8-Channel, 50 kSPS to 200 kSPS, 8-Bit A/D Converter, 16-pin TSSOP, Pb-Free", Manufacturer="National Semiconductor", PackageTopMarking=NSUZXYTT*88S022*CIMT, PowerWise=Y, Code_JEDEC=MO-153-AB, ComponentLink1Description="ADC088S022 Datasheet", ComponentLink1URL=http://www.national.com/ds/AD/ADC088S022.pdf, ComponentLink2Description="ADC088S022 Web Page", ComponentLink2URL=http://www.national.com/pf/AD/ADC088S022.html, ComponentLink3Description="MTC16 Package Page", ComponentLink3URL=http://www.national.com/packaging/folders/mtc16.html, CompType="ADC IC", DatasheetVersion=Feb-2010, PackageDescription="Molded TSSOP, Jedec, 5 x 4.4 x 0.9mm Body, 16 Lead, 0.65mm Pitch", PackageReference=MTC16, PackageVersion="revD, Jun-2003", PinCount=16, RevisionNote="Component URLs added", RoHS=Y
U? U? U? U?: library part CMP-1557-00012-2, "SENSOR CURRENT HALL 12.5A AC/DC", Case/Package=SOIC, Current Sensing=12.5A, Frequency=100kHz, Max Operating Temperature=125°C, Max Supply Current=5.5mA, Max Supply Voltage=5.5V, Min Operating Temperature=-40°C, Min Supply Voltage=3V, Operating Supply Voltage=3.3V, Package Quantity=1, Quiescent Current=4mA, -3db Bandwidth=100kHz, Accuracy=5%, Bandwidth=100kHz, Height=1.5mm, Length=4.9mm, Linearity=1%, Number of Channels=1, Number of Pins=8, Packaging="Tape and Reel", Polarity=Bidirectional, REACH SVHC="No SVHC", Response Time=4.6us, RoHS Compliant=Yes, Sensitivity=110mV/A, Series=-, Width=3.9mm
U?: library part CMP-0244-00312-1, "Fixed Low Drop Positive Voltage Regulator, 5V, 4-Pin SOT-223, Tape and Reel", ComponentLink1Description="Manufacturer URL", ComponentLink1URL=http://www.st.com, ComponentLink2Description=Datasheet, ComponentLink2URL=http://www.st.com/internet/com/TECHNICAL_RESOURCES/TECHNICAL_LITERATURE/DATASHEET/CD00000544.pdf, DatasheetVersion=1/11/2011, PackageDescription="4-Pin SOT-223 Package, 6.5 x 3.5 mm Body, 2.3 mm Pitch, 7 mm Lead Span", PackageReference=SOT-223, PackageVersion=2010
U?: library part CMP-0244-00310-1, "Fixed Low Drop Positive Voltage Regulator, 3.3V, 4-Pin SOT-223, Tape and Reel", ComponentLink1Description="Manufacturer URL", ComponentLink1URL=http://www.st.com, ComponentLink2Description=Datasheet, ComponentLink2URL=http://www.st.com/internet/com/TECHNICAL_RESOURCES/TECHNICAL_LITERATURE/DATASHEET/CD00000544.pdf, DatasheetVersion=1/11/2011, PackageDescription="4-Pin SOT-223 Package, 6.5 x 3.5 mm Body, 2.3 mm Pitch, 7 mm Lead Span", PackageReference=SOT-223, PackageVersion=2010
U? U?: library part CMP-015-00013-1, "USB Bus Controller, CMOS", Case/Package=HVQCCN, Max Operating Temperature=70°C, Max Supply Voltage=1.32V, Min Operating Temperature=0°C, Min Supply Voltage=1.08V, Pins=56, RoHS Compliant=Yes
Y1: library part CMP-27762-011708-1, "Crystal 48MHz ±20ppm 18pF SMD-4 3.2mm x 2.5mm", Case/Package=CSMD, ESR (Equivalent Series Resistance)=35R, Frequency=48MHz, Frequency Stability=50ppm, Frequency Tolerance=20ppm, Load Capacitance=18pF, Max Operating Temperature=70°C, Min Operating Temperature=-20°C, Operating Frequency="48 MHz", Package Quantity=1000, Resistor Type=Ceramic, Depth=2.5mm, Height=0.031inch, Lead Free="Lead Free", Length=3.2mm, Mount="Surface Mount", Number of Pins=4, Packaging="Tape and Reel", Radiation Hardening=No, REACH SVHC="No SVHC", RoHS Compliant=Yes, Series=ABM8, Series Resistance=35R, Termination=SMD/SMT, Tolerance=20ppm, Width=0.098inch
Y2: library part CMP-40224-000006-1, "CRYSTAL 32.7680KHZ 12.5PF SMD", Frequency=32.768kHz, Load Capacitance=12.5pF, Manufacturer="ECS International", Package=ECX-1210, Temperature="-40°C to +85°C", Temperature Range High=+85°C, Temperature Range Low=-40°C, Tolerance=20ppm, Automotive=No, Category=Crys, ComponentLink2Description=Datasheet, ComponentLink2URL=https://ecsxtal.com/store/pdf/ECX-1210.pdf, Device Class L1="Passive Components", Device Class L2="Crystals / Oscillators", Device Class L3=Crystals, Digikey Description="CRYSTAL 32.7680KHZ 12.5PF SMD", ESR=90kΩ, Height=0.5mm, Lead Free=Yes, Manufacturer Part Number=ECS-.327-12.5-1210-TR, Octopart=https://octopart.com/ecs-.327-12.5-1210-tr-ecs+international-81221340, RoHS=TRUE, Series=ECX-1210
Y2: library part CMP-2000-05733-3, "Crystal 25MHz ±20ppm (Tol) ±30ppm (Stability) 18pF FUND 60Ω 4-Pin SMD T/R", Case/Package=CSMD, ESR (Equivalent Series Resistance)=60R, Frequency=25MHz, Frequency Stability=30ppm, Frequency Tolerance=20ppm, Load Capacitance=18pF, Max Operating Temperature=85°C, Min Operating Temperature=-40°C, Operating Frequency="25 MHz", Package Quantity=1000, Depth=2.5mm, Height=0.039inch, Lead Free="Lead Free", Length=3.2mm, Mount="Surface Mount", Number of Pins=4, Packaging="Tape and Reel", Radiation Hardening=No, Series=ABM8G, Series Resistance=60R, Termination=SMD/SMT, Tolerance=20ppm, Width=0.098inch

## Nets (pads, with @x,y where several pads share a name; then routed paths per layer and width w, separated by ;. In a path a pad name is that pad's centre, name@x,y a point inside that pad or via, vN(x,y) a via of type N, cw(c..) or ccw(c..) an arc to the next point about the centre after c; other vN are vias at no path point)
2V_AUX_ENABLE: R?.1@7529.41,7850
2V_AUX_FB: R?.1@12704.41,7850 R?.2@12925.59,7850 U13.6
2V_AUX_I_SENSE: R?.2@8150.59,6375
2V_AUX_nFAULT: R?.1@8784.41,6375 R?.2@7810.59,6375 U?.6@8666.18,6280
2V_AUX_OUT: C96.2 C145.2 C146.2 C253.2 C254.2 C255.2 C256.2 J2.37 J2.39 J2.41 J2.43 J2.45 J2.47 L9.2 R?.1@12874.41,7850 R?.1@13214.41,7850 TP59.1 U9.3
2V_AUX_VCC: C141.2 C142.2 C143.2 D?.2@8952.28,6308.5 U13.2 U?.3@8483.82,6280 U?.4@8483.82,6230
2V_REG_EN: R?.1@7079.41,7850 R?.2@7580.59,7850 U13.7
3V3: C18.1 C19.1 C20.1 C21.1 C24.1 C25.1 C39.2 FB1.1 J6.01 R50.2 R52.2@12110,5600.59 R59.2@10480,5600.59 R60.2@10250,5600.59 R66.1 SW2.2 U8.1@15218.66,5528.27 U8.24 U8.36 U8.48
3V3_AUX_ENABLE: R?.2@7580.59,7095
3V3_AUX_FB: C72.2 C73.2 C74.2 C75.2 C99.2 C100.2 C150.2 C151.2 C152.2 C153.2 C154.2 J2.25 J2.27 J2.29 J2.31 J2.33 J2.35 L10.2 R60.2@7883.46,4570 R61.2 R?.1@12509.41,7095 R?.2@7410.59,1270 R?.2@10770.59,8810 R?.2@12780.59,8810 R?.2@13255.59,8810 R?.2@13655.59,8810 TP60.1 U5.16 U5.31 U5.44 U5.55 U14.6
3V3_AUX_I_SENSE: R?.2@9520.59,6375
3V3_AUX_nFAULT: R?.1@10154.41,6375 R?.2@9175.59,6375 U?.6@10031.18,6280
3V3_AUX_VCC: C148.2 C149.2 D?.2@10322.28,6308.5 U14.2 U?.3@9848.82,6280 U?.4@9848.82,6230
3V3_REG_EN: R?.1@7079.41,7095 R?.1@7529.41,7095 U14.7
3V3_V_SENSE: R?.1@7079.41,5020 R?.2@7690.59,5020
5V_AUX_ENABLE: R?_REG_1.2@8215,10275.59
5V_ENABLE_REG_0: R?_REG_0.2@8255,9550.59
5V_MAIN_I_SENSE: R?.2@10885.59,6375
5V_MAIN_nFAULT: R?.1@11519.41,6375 R?.2@10545.59,6375 U?.6@11401.18,6280
5V_MAIN_VCC: C156_REG_0.2 C157_REG_0.2 C158_REG_0.2 D?.2@11687.28,6308.5 U15_REG_0.2 U?.3@11218.82,6280 U?.4@11218.82,6230
5V_REG_EN_REG_0: R?_REG_0.1@7085,9499.41 R?_REG_0.1@8255,9499.41 U15_REG_0.7
5V_REG_EN_REG_1: R?_REG_1.1@7085,10224.41 R?_REG_1.1@8215,10224.41 U15_REG_1.7
5V_REG_FB_REG_0: C159_REG_0.2 C160_REG_0.2 C161_REG_0.2 C162_REG_0.2 J2.1 J2.3 J2.5 J2.7 J2.9 J2.11 L11_REG_0.2 R?_REG_0.1@16615,9499.41 U15_REG_0.6
5V_REG_FB_REG_1: C58.1 C76.1 C88.1 C94.1 C159_REG_1.2 C160_REG_1.2 C161_REG_1.2 C162_REG_1.2 J2.13 J2.15 J2.17 J2.19 J2.21 J2.23 L11_REG_1.2 R31.1@26565,8769.41 R44.1 R48.1 R52.1@9990,8769.41 R?_REG_1.1@16315,10224.41 U4.5 U6.5 U7.5@16039.13,8797.4 U8.5@11004.13,8797.4 U15_REG_1.6
5V_V_SENSE: R?.1@8179.41,5020 R?.2@8790.59,5020
ADC_MISO: U16.15 U17.15
ADC_MOSI: U16.14 U17.14
ADC_nCS_1: U16.1
ADC_nCS_2: U17.1
ADC_SCLK: U16.16 U17.16
AMBIENT_TEMP: R139.2 R?.1@7359.41,1270
BOOT: C39.1 R63.1 R65.2 U8.45
CAN1_RX: U8.33
CAN1_TX: U8.34
CAN2_RX: U8.42
CAN2_TX: U8.43
CAN_INH: R56.2@11310,5600.59
CAN_MISO: U8.6@10364.25,5885.62
CAN_MOSI: U8.11@10485.75,5925
CAN_N: C12.1 D3.1 L1.4 R36.2 R37.2
CAN_nCS: U8.14@10485.75,5984.07
CAN_P: C14.2 D3.2 L1.1 R37.1 R38.1
CAN_RX: U8.4@10364.25,5925
CAN_SCLK: U8.8@10485.75,5865.93
CAN_TX: U8.1@10364.25,5984.07
CAN_VSUP: D2.2
ETH_GND: C97.1 J5.11 J5.12 R53.2 R54.2@11665,4589.69 R55.2 R56.2@10315,4589.69 R57.2@10085,4589.69 R58.2 R59.2@9625,4589.69 R194.2
GBE_LED_ACT: J2.58 J5.L4
GBE_LED_LINK: J2.60 J5.L2
GBE_MDI0_N: J2.4 J5.2
GBE_MDI0_P: J2.2 J5.1
GBE_MDI1_N: J2.12 J5.4
GBE_MDI1_P: J2.10 J5.3
GBE_MDI2_N: J2.20 J5.8
GBE_MDI2_P: J2.18 J5.7
GBE_MDI3_N: J2.28 J5.10
GBE_MDI3_P: J2.26 J5.9
GND: C8.2 C9.2 C10.2 C11.2 C12.2 C13.2 C14.1 C17.1 C18.2 C19.2 C20.2 C21.2 C22.2 C23.2 C24.2 C25.2 C26.2 C27.2 C33.2 C34.2 C35.2 C36.2 C40.2 C55.2 C56.1 C57.1 C58.2 C61.2 C62.1 C63.1 C64.1 C65.1 C66.1 C67.1 C68.1 C69.1 C70.1 C71.1 C72.1 C73.1 C74.1 C75.1 C76.2 C77.2 C78.1 C79.1 C88.2 C89.2 C90.1 C91.1 C92.2 C93.2 C94.2 C95.2 C96.1 C97.2 C98.1 C99.1 C100.1 C141.1 C142.1 C143.1 C145.1 C146.1 C148.1 C149.1 C150.1 C151.1 C152.1 C153.1 C154.1 C156_REG_0.1 C156_REG_1.1 C157_REG_0.1 C157_REG_1.1 C158_REG_0.1 C158_REG_1.1 C159_REG_0.1 C159_REG_1.1 C160_REG_0.1 C160_REG_1.1 C161_REG_0.1 C161_REG_1.1 C162_REG_0.1 C162_REG_1.1 C253.1 C254.1 C255.1 C256.1 C?.2@7283.84,5020 C?.2@7518.39,5000 C?.2@7563.84,1270 C?.2@7733.84,1270 C?.2@7908.84,1270 C?.2@7963.84,6375 C?.2@8383.84,5020 C?.2@8583.84,1270 C?.2@8613.39,5000 C?.2@8753.84,1270 C?.2@8923.84,1270 C?.2@9333.84,6375 C?.2@10698.84,6375 C?.2@12068.84,6375 D3.3 D7.1 D7.4 D26.3 D26.8 D27.3 D27.8 D28.3 D28.8 D29.3 D29.8 D30.3 D30.8 D31.3 D31.8 D37.2 D38.2 D39_REG_0.2 D39_REG_1.2 J2.6 J2.8 J2.14 J2.16 J2.22 J2.24 J2.30 J2.32 J2.38 J2.40 J2.46 J2.48 J2.P1 J2.P2 J2.P3 J2.P4 J3.4 J3.7 J3.13 J3.16 J4.A4 J4.A7 J4.B4 J4.B7 J4.Shell J6.03 J6.05 Q5.2 R28.1 R33.1@10780,5959.41 R53.1 R54.1@11665,4550.31 R55.1 R56.1@10315,4550.31 R57.1@10085,4550.31 R58.1 R59.1@9625,4550.31 R65.1 R133.1 R135.1 R137_REG_0.1 R137_REG_1.1 R139.1 R194.1 R?.1@7079.41,6375 R?.1@7249.41,6375 R?.1@11319.41,8810 R?.1@11489.41,8810 R?.1@11889.41,8810 R?.1@13774.41,8810 R?.2@7130.59,5020 R?.2@7130.59,7095 R?.2@7130.59,7850 R?.2@8230.59,5020 R?.2@8320.59,6375 R?.2@9685.59,6375 R?.2@11055.59,6375 R?.2@12390.59,7095 R?.2@12420.59,6375 R?.2@12755.59,7850 R?.2@13095.59,7850 R?_REG_0.2@7085,9550.59 R?_REG_0.2@16085,9550.59 R?_REG_1.2@7085,10275.59 R?_REG_1.2@15805,10275.59 SW1.1 SW3.2 U4.2 U5.57 U6.2 U7.2@15930.87,8760 U7.5@13325,5965.12 U8.2@10364.25,5964.38 U8.2@10895.87,8760 U8.19 U8.23 U8.35 U8.47 U9.1 U13.4 U13.8 U14.4 U14.8 U15_REG_0.4 U15_REG_0.8 U15_REG_1.4 U15_REG_1.8 U16.3 U16.12 U17.3 U17.12 U?.1@7827.8,5005.55 U?.1@8927.8,5005.55 U?.5@8666.18,6230 U?.5@10031.18,6230 U?.5@11401.18,6230 U?.5@12766.18,6230 Y1.2 Y1.4 Y2.2@9418.31,8731.54 Y2.4
I_nFAULT: R?.1@12814.41,6005 U7.6
I_SENSE: R?.1@12984.41,6005
IN_A_0: U16.4
IN_A_1: U16.5
IN_A_2: U16.6
IN_A_3: U16.7
IN_A_4: U16.8
IN_A_5: U16.9
IN_A_6: U16.10
IN_A_7: U16.11
IN_B_0: U17.4
IN_B_1: U17.5
IN_B_2: U17.6
IN_B_3: U17.7
IN_B_4: U17.8
IN_B_5: U17.9
IN_B_6: U17.10
IN_B_7: U17.11
INH: R32.1@11180,5959.41
INT_3V3: C8.1 C10.1 C?.1@7441.61,5000 C?.1@7871.16,1270 C?.1@7926.16,6375 C?.1@8886.16,1270 C?.1@9296.16,6375 C?.1@10661.16,6375 C?.1@12031.16,6375 D?.3 R?.1@7639.41,5020 R?.1@7699.41,7095 R?.1@8039.41,1270 R?.1@9054.41,1270 R?.2@7750.59,7850 R?.2@8835.59,6375 R?.2@10205.59,6375 R?.2@11570.59,6375 R?.2@12865.59,6005 R?.2@12940.59,6375 R?_REG_0.1@8785,9499.41 R?_REG_1.1@8725,10224.41 U7.8 U8.5@10364.25,5905.31 U16.2 U17.2 U?.2@7827.8,4915 U?.4@8052.2,4915 U?.8@8666.18,6380 U?.8@10031.18,6380 U?.8@11401.18,6380 U?.8@12766.18,6380
INT_5V: C9.1 C?.1@8536.61,5000 R?.1@8739.41,5020 U8.3@10364.25,5944.69 U?.2@8927.8,4915 U?.4@9152.2,4915
INT_VCC: C156_REG_1.2 C157_REG_1.2 C158_REG_1.2 D?.2@13057.28,6308.5 R?.2@7640.59,6375 U15_REG_1.2 U?.3@12583.82,6280 U?.4@12583.82,6230
INT_VCC_I_SENSE: R?.2@12255.59,6375
INT_VCC_nFAULT: R?.1@12889.41,6375 R?.2@11910.59,6375 U?.6@12766.18,6280
LPUART1_RX: U8.11@15218.66,5331.42
LPUART1_TX: U8.10@15218.66,5351.1
MCU_G_LED: D8.1
MCU_R_LED: D8.4
MCU_SCL: J2.56
MCU_SDA: J2.54
NetC11_1: C11.1 D2.1 R34.2 U8.10@10485.75,5905.31
NetC13_1: C13.1 R34.1 R35.2 SW1.2
NetC98_2: C98.2 J5.5 J5.6
NetC?_1: C?.1@12166.16,7095 U14.3
NetC?_2: C?.2@12063.84,7850 D37.1 L9.1 U13.1
NetC?_REG_0_1: C?_REG_0.1 U15_REG_0.3
NetC?_REG_0_2: C?_REG_0.2 D39_REG_0.1 L11_REG_0.1 U15_REG_0.1
NetC?_REG_1_1: C?_REG_1.1 U15_REG_1.3
NetC?_REG_1_2: C?_REG_1.2 D39_REG_1.1 L11_REG_1.1 U15_REG_1.1
NetD7_2: D7.2 R52.1@12110,5549.41
NetD7_3: D7.3 R54.1@11880,5549.41
NetD8_2: D8.2 R59.1@10480,5549.41
NetD8_3: D8.3 R60.1@10250,5549.41
NetD?_1: D?.1@10322.28,6371.5 R?.1@9634.41,6375
NetD?_4: D?.4@11722.72,6371.5 R?.1@10494.41,6375
NetF1_2: F1.2 Q1.5-6-7-8 Q2.5-6-7-8
NetJ5_L1: J5.L1 R60.1@7816.54,4570
NetJ5_L3: J5.L3 R61.1
NetQ5_1: Q5.1 R32.2@11180,6010.59 R33.2@10780,6010.59
NetQ11_1: Q11.1 R56.1@11310,5549.41 R57.1@10710,5549.41
NetQ11_3: Q11.3 R54.2@11880,5600.59
NetR30_2: R30.2 R31.2@26565,8820.59 U4.3 U4.4
NetR35_1: R35.1 U8.9@10485.75,5885.62
NetR42_2: R42.2 R44.2 U6.3 U6.4
NetR46_2: R46.2 R48.2 U7.3@15930.87,8722.6 U7.4@16039.13,8722.6
NetR51_2: R51.2 R52.2@9990,8820.59 U8.3@10895.87,8722.6 U8.4@11004.13,8722.6
NetR63_2: R63.2 SW2.1
NetR64_2: R64.2 SW3.1
NetR?_1: R?.1@9469.41,6375 U?.7@10031.18,6330
NetR?_2: R?.2@13035.59,6005 U7.7
NetR?_REG_0_1: R?_REG_0.1@16085,9499.41 R?_REG_0.2@16615,9550.59
NetR?_REG_1_1: R?_REG_1.1@15805,10224.41 R?_REG_1.2@16315,10275.59
nFORCE_RECOVERY: J2.57
nMOD_SLEEP: J2.59
nSHUTDOWN_REQ: J2.51
nSYS_RESET: J2.53
POWER_EN: J2.49
PRE_BATT_PWR: R?.2@7470.59,6375
PRE_CAN_N: L1.3 U8.12@10485.75,5944.69
PRE_CAN_P: L1.2 U8.13@10485.75,5964.38
PRE_SHUNT: Q3.5-6-7-8 Q4.5-6-7-8 U7.1@13175,5774.88 U7.2@13225,5774.88
PRE_USB0_RX_N: R186.2 U5.7
PRE_USB0_RX_P: R190.2 U5.6
PRE_USB0_TX_N: C80.1 U5.4
PRE_USB0_TX_P: C84.1 U5.3
PRE_USB1_RX_N: R187.2 U5.14
PRE_USB1_RX_P: R191.2 U5.13
PRE_USB1_TX_N: C81.1 U5.11
PRE_USB1_TX_P: C85.1 U5.10
PRE_USB2_RX_N: R188.2 U5.23
PRE_USB2_RX_P: R192.2 U5.22
PRE_USB2_TX_N: C82.1 U5.20
PRE_USB2_TX_P: C86.1 U5.19
PRE_USB3_RX_N: R189.2 U5.30
PRE_USB3_RX_P: R193.2 U5.29
PRE_USB3_TX_N: C83.1 U5.27
PRE_USB3_TX_P: C87.1 U5.26
PRE_VCC: D1.1 Q1.1 Q1.2 Q1.3 Q2.1 Q2.2 Q2.3 Q3.1 Q3.2 Q3.3 Q4.1 Q4.2 Q4.3 R31.2@11455.59,6005
PRE_VCC_SENSE: R?.1@7419.41,6375 R?.2@7130.59,6375
PWR_IN: C?.1@7246.16,5020 C?.1@8346.16,5020 U7.3@13275,5774.88 U7.4@13325,5774.88 U?.1@8483.82,6380 U?.1@9848.82,6380 U?.1@11218.82,6380 U?.1@12583.82,6380 U?.2@8483.82,6330 U?.2@9848.82,6330 U?.2@11218.82,6330 U?.2@12583.82,6330 U?.3@7827.8,4824.45 U?.3@8927.8,4824.45
PWR_MOSFET: Q3.4 Q4.4 Q5.3 R31.1@11404.41,6005
RESETN: C40.1 J6.10 R64.1 R66.2 U8.7@15218.66,5410.16
RP_MOS_LINK: D1.2 Q1.4 Q2.4 R28.2
SLEEP/nWAKE: J2.55
SPI1_MISO: U8.14@15296.42,5253.66
SPI1_MOSI: U8.15
SPI1_nCS: U8.12@15218.66,5311.73
SPI1_SCLK: U8.13@15276.73,5253.66
SPI2_MISO: U8.28
SPI2_MOSI: U8.29
SPI2_nCS: U8.26
SPI2_SCLK: U8.27
SWCLK: J6.04 R50.1 U8.38
SWDIO: J6.02 U8.37
SWO: J6.06 U8.40
TEMP_SENSE: R133.2 R?.1@7699.41,7850
TEMP_SENSE_REG_0: R137_REG_0.2 R?_REG_0.2@8785,9550.59
TEMP_SENSE_REG_1: R137_REG_1.2 R?_REG_1.2@8725,10275.59
TERM_CAP: C17.2 R36.1 R38.2
USB0_RX_N: D26.1 D26.10 J3.5 R186.1
USB0_RX_P: D26.2 D26.9 J3.6 R190.1
USB0_TX_N: C80.2 D26.4 D26.7 J3.8
USB0_TX_P: C84.2 D26.5 D26.6 J3.9
USB1_RX_N: D30.1 D30.10 J3.14 R187.1
USB1_RX_P: D30.2 D30.9 J3.15 R191.1
USB1_TX_N: C81.2 D30.4 D30.7 J3.17
USB1_TX_P: C85.2 D30.5 D30.6 J3.18
USB2_RX_N: D27.1 D27.10 J4.A5 R188.1
USB2_RX_P: D27.2 D27.9 J4.A6 R192.1
USB2_TX_N: C82.2 D27.4 D27.7 J4.A8
USB2_TX_P: C86.2 D27.5 D27.6 J4.A9
USB2UP_N: J2.52 R32.1@31505,8780.32
USB2UP_P: J2.50 R33.1@31275,8780.32
USB3_RX_N: D31.1 D31.10 J4.B5 R189.1
USB3_RX_P: D31.2 D31.9 J4.B6 R193.1
USB3_TX_N: C83.2 D31.4 D31.7 J4.B8
USB3_TX_P: C87.2 D31.5 D31.6 J4.B9
USB3UP_RX_N: R184.2 U5.51
USB3UP_RX_P: R185.2 U5.50
USB3UP_TX_N: C59.2 J2.36
USB3UP_TX_P: C60.1 U5.47
USB_1V2: C64.2 C65.2 C66.2 C67.2 C68.2 C69.2 C70.2 C71.2 C95.1 TP58.1 U5.5 U5.12 U5.15 U5.21 U5.28 U5.33 U5.43 U5.49 U9.2 U9.4
USB_ATEST: R?.2@11940.59,8810 U5.52
USB_CFG_CHG_EN: R?.2@11370.59,8810 TP7.1 U5.40
USB_CFG_NON_REM: R?.2@13825.59,8810 TP5.1 U5.41
USB_nRESET: R40.1 R?.1@13604.41,8810 U5.42
USB_nRST: R40.2
USB_PRT_CTL1: R30.1 TP54.1 U5.36
USB_PRT_CTL2: R42.1 TP55.1 U5.35
USB_PRT_CTL3: R46.1 TP56.1 U5.34
USB_PRT_CTL4: R51.1 TP57.1 U5.32
USB_RBIAS: R?.2@11540.59,8810 U5.56
USB_SPI_MISO: R?.1@10719.41,8810 TP8.1 U5.39
USB_SPI_SCLK: R?.1@12729.41,8810 TP6.1 U5.38
USBH0_D_N: D28.2 D28.9 J3.2 U5.2
USBH0_D_P: D28.1 D28.10 J3.3 U5.1
USBH1_D_N: D28.5 D28.6 J3.11 U5.9
USBH1_D_P: D28.4 D28.7 J3.12 U5.8
USBH2_D_N: D29.2 D29.9 J4.A2 U5.18
USBH2_D_P: D29.1 D29.10 J4.A3 U5.17
USBH3_D_N: D29.5 D29.6 J4.B2 U5.25
USBH3_D_P: D29.4 D29.7 J4.B3 U5.24
VBUS_1: C55.1 C56.2 C57.2 J3.1 U4.1
VBUS_2: C61.1 C62.2 C63.2 J3.10 U6.1
VBUS_3: C77.1 C78.2 C79.2 J4.A1 U7.1@15930.87,8797.4
VBUS_4: C89.1 C90.2 C91.2 J4.B1 U8.1@10895.87,8797.4
VBUS_DET: R?.1@13204.41,8810 U5.37
VCC: Q11.2 R57.2@10710,5600.59
VCC_SENSE: R?.1@7589.41,6375 R?.2@7300.59,6375
VDDA: C22.1 C23.1 C26.1 C27.1 FB1.2 U8.20 U8.21
X25_N: C93.1 U5.53 Y2.3
X25_P: C92.1 U5.54 Y2.1@9331.69,8731.54
X32_N: C36.1 U8.4@15218.66,5469.21 Y2.2@9866.24,5585
X32_P: C35.1 U8.3@15218.66,5488.9 Y2.1@9833.76,5585
X_N: C33.1 U8.6@15218.66,5429.84 Y1.1
X_P: C34.1 U8.5@15218.66,5449.53 Y1.3